# Altium PCB board.PcbDoc
Units mm, origin at the board's own origin, x right, y up, seen from the top; angles counter-clockwise.
Board outline 116 x 94 mm, 2 copper layers (Top Layer, Bottom Layer); 13 components, 88 nets, 366 pads, 97 vias.
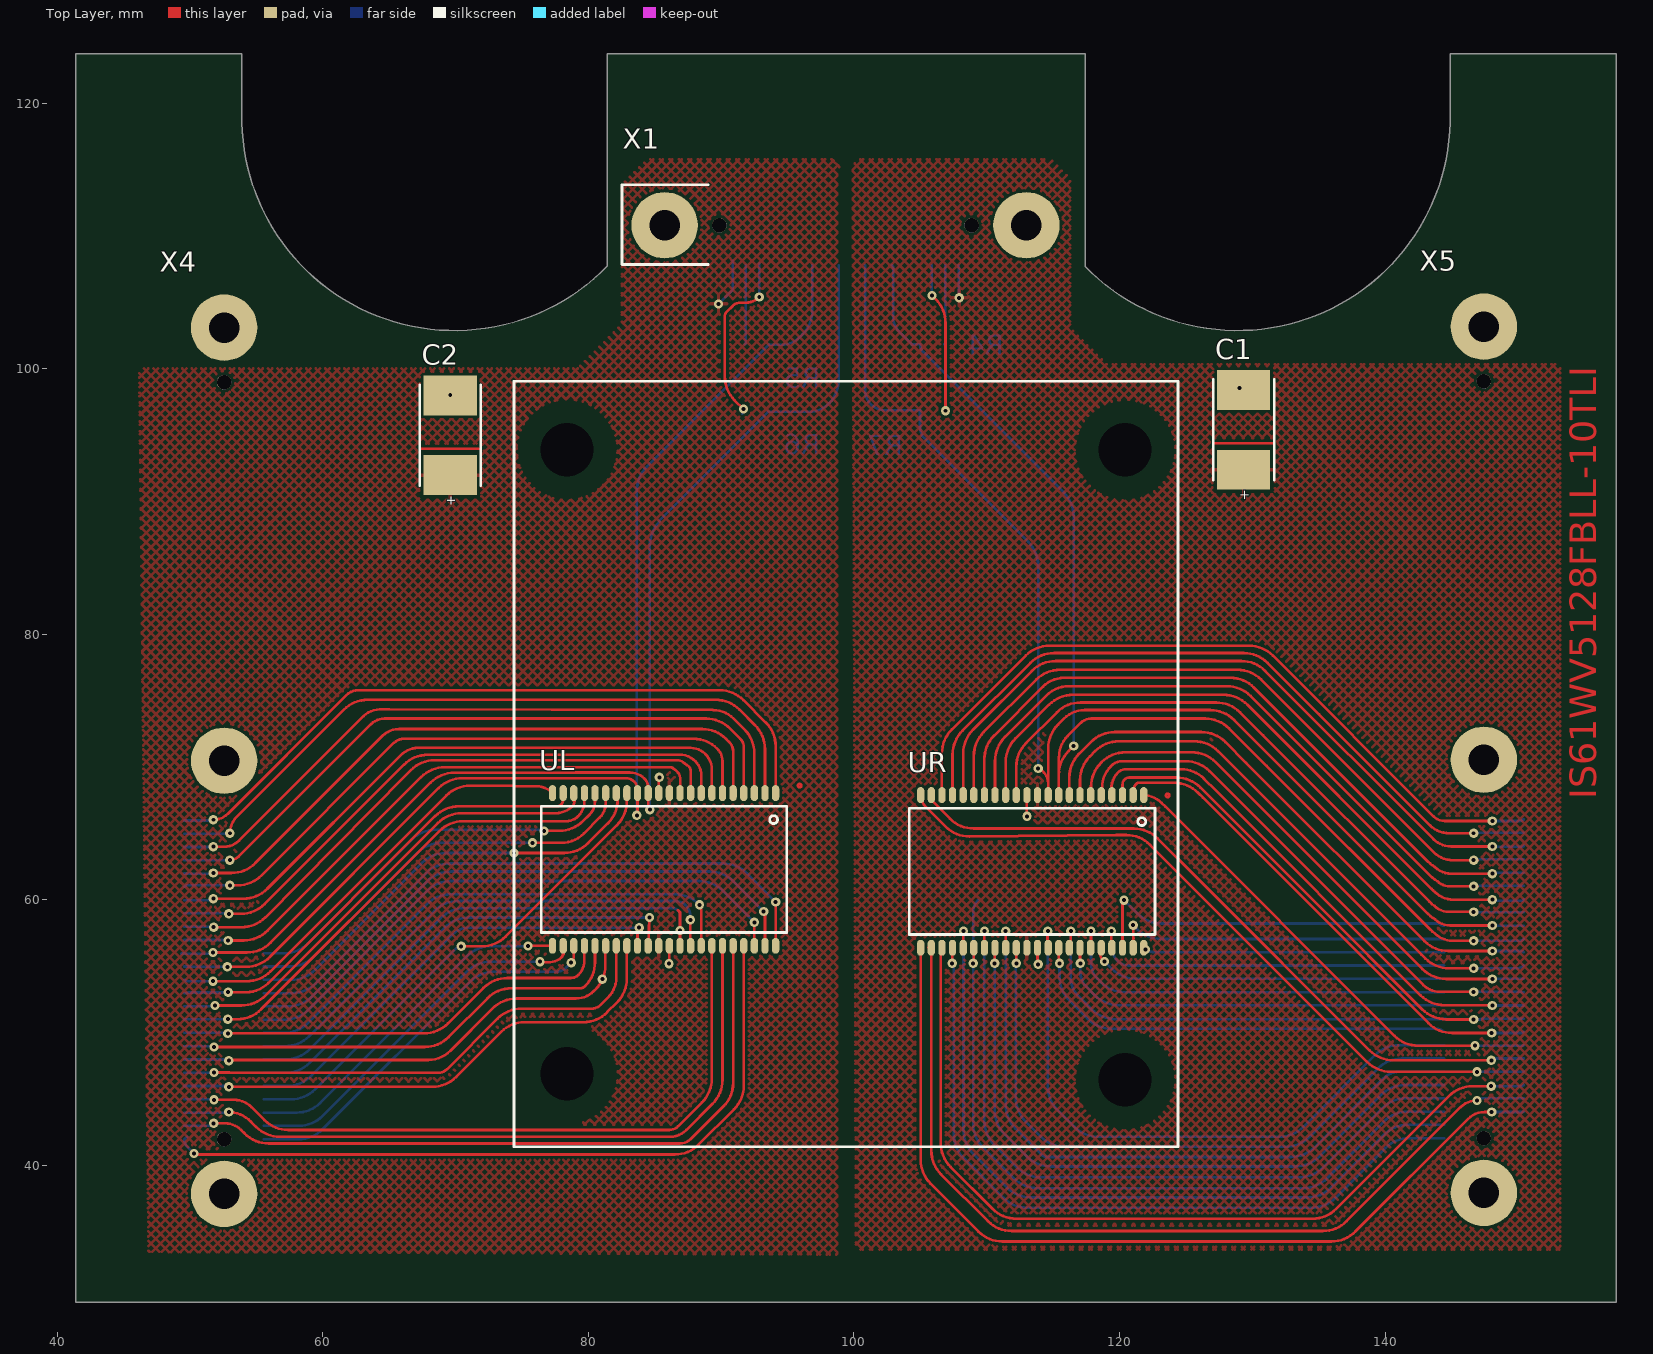
[diagram p0: Top Layer view]
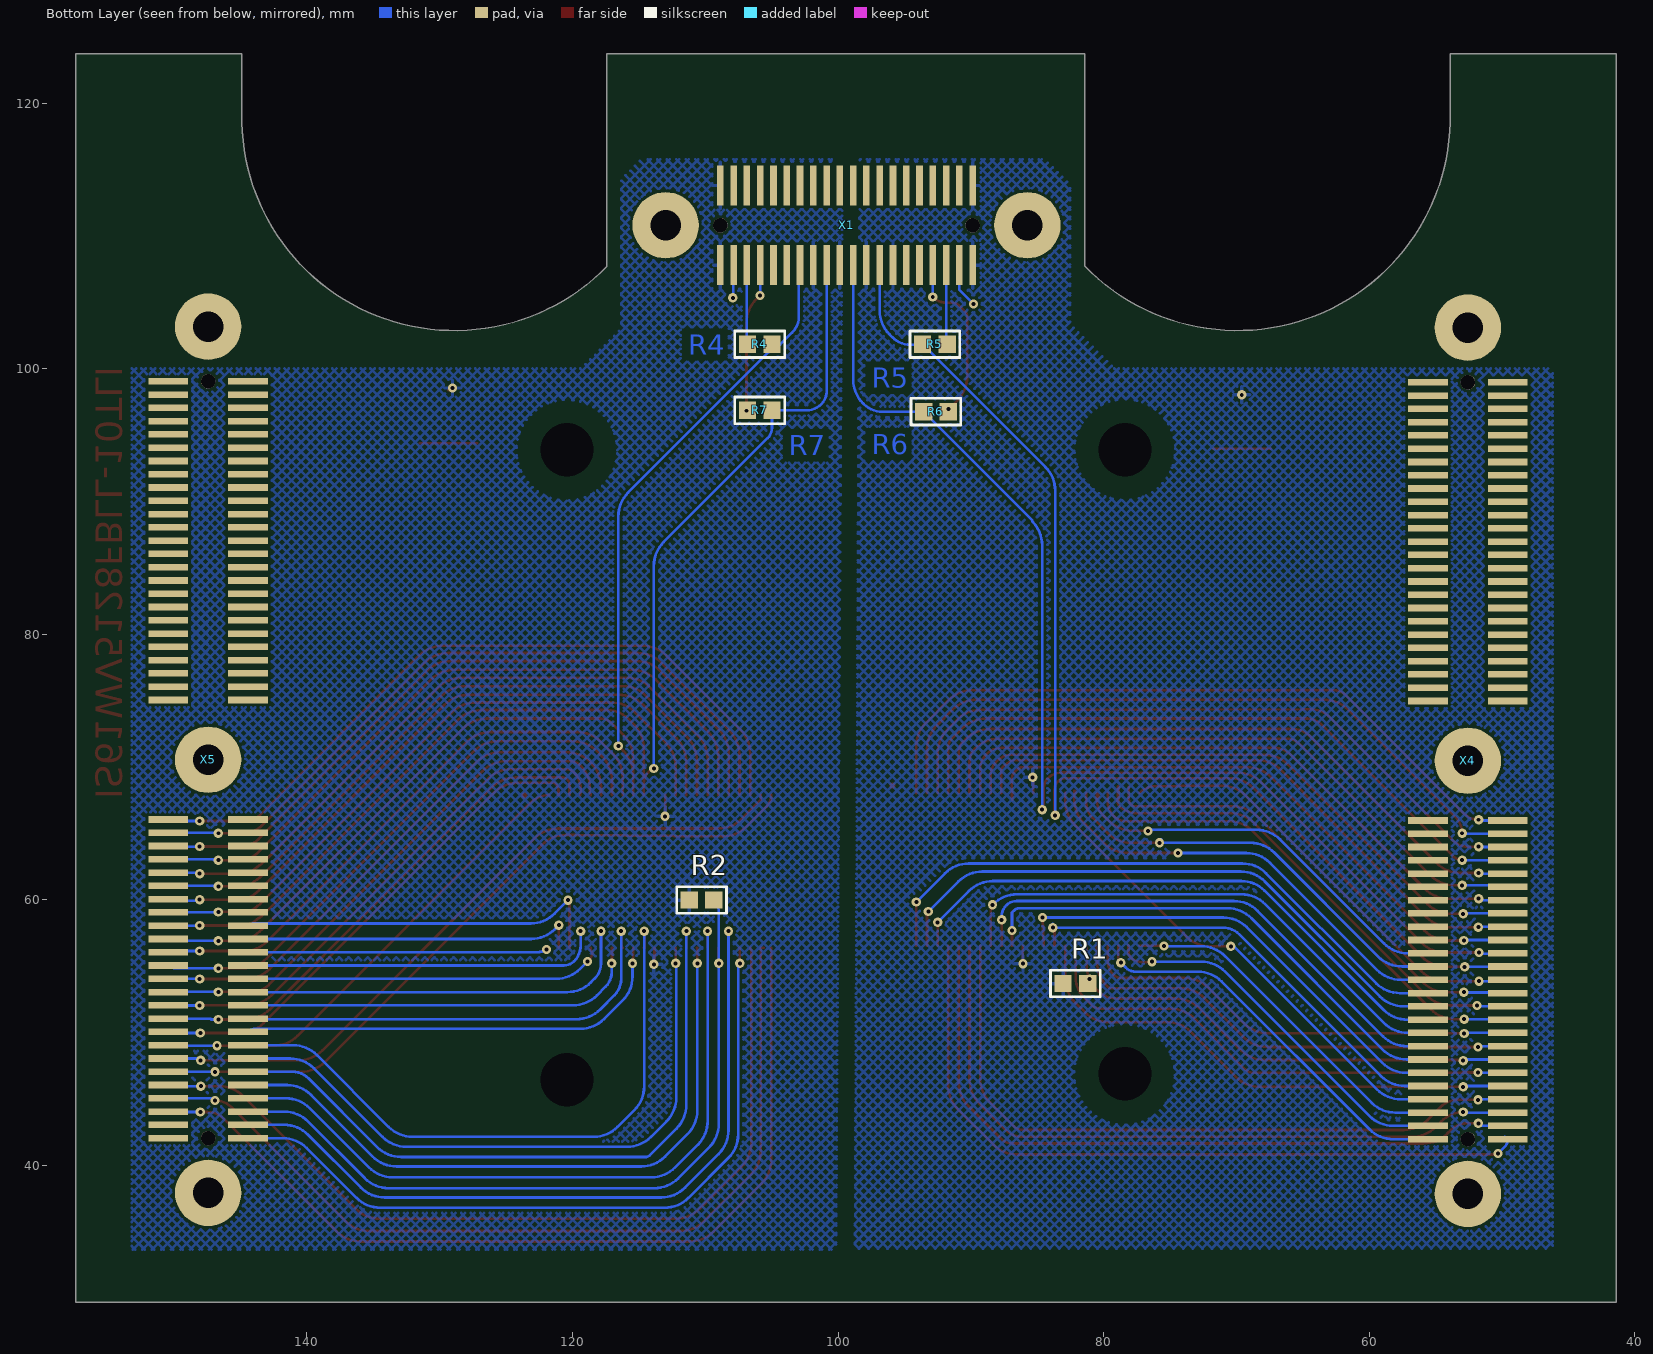
[diagram p1: Bottom Layer view, seen from below]
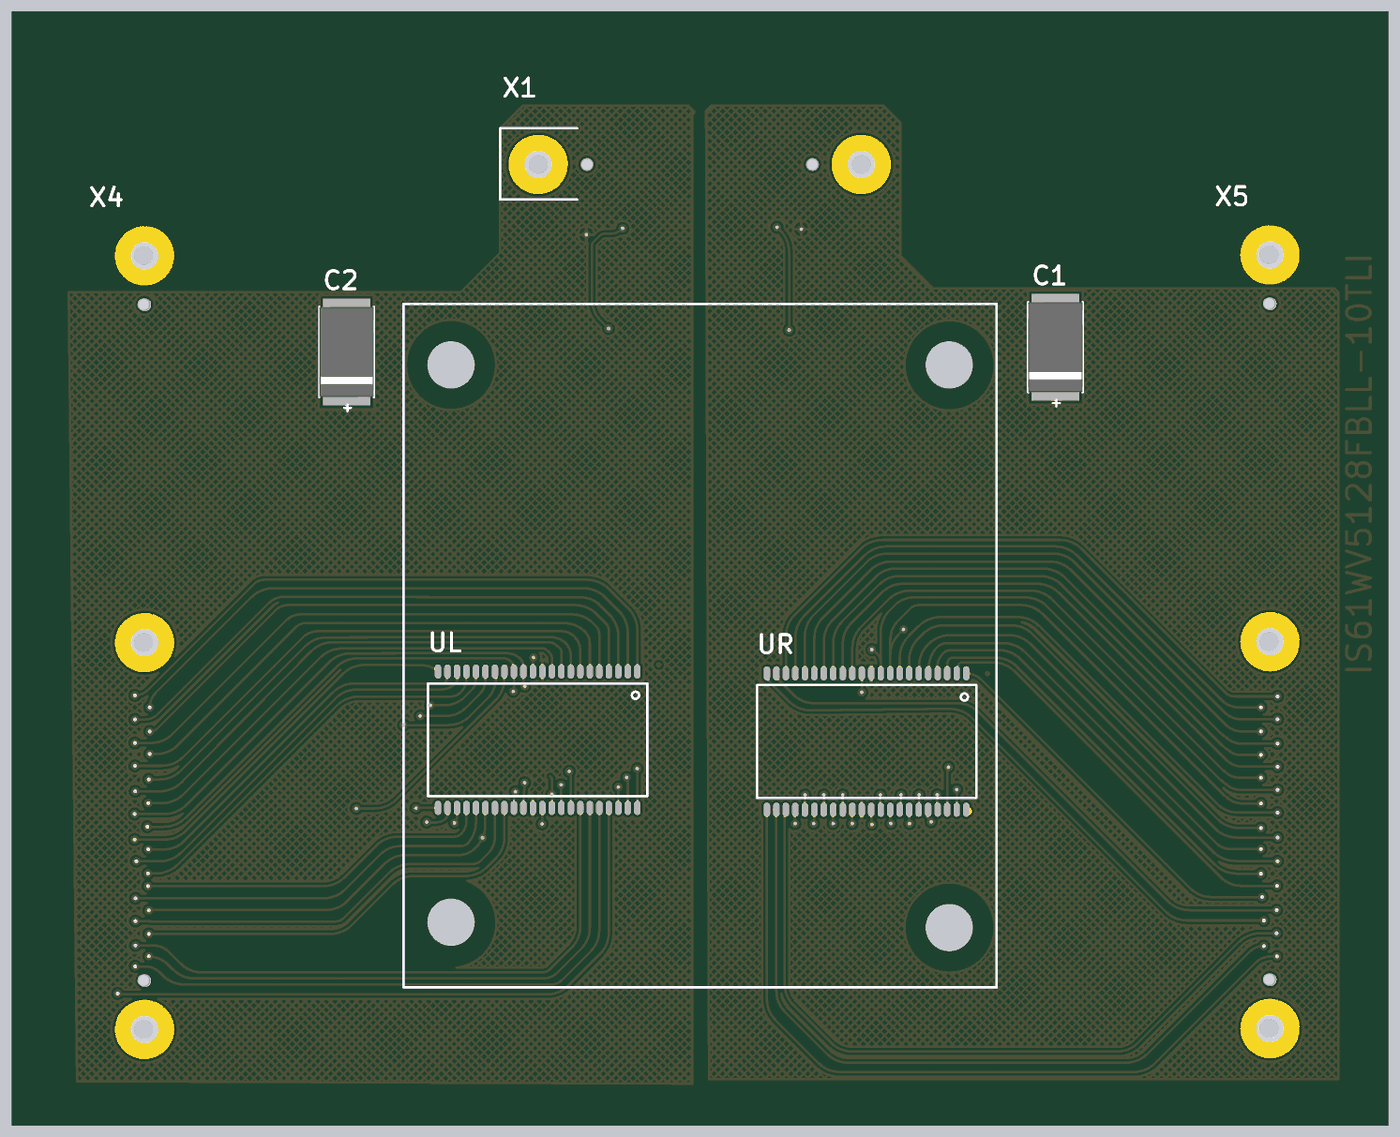
[diagram p2: 3D render of the assembled board from above, using the file's embedded part models]

## Layer stack, top to bottom
Top Solder: solder mask 0.0102, Solder Resist, Dk 3.5
Top Layer: signal copper 0.0356
Dielectric 1: dielectric 0.32, FR-4, Dk 4.8
Bottom Layer: signal copper 0.0356
Bottom Solder: solder mask 0.0102, Solder Resist, Dk 3.5

## Board outline
41.4,29.718 41.4,123.718 53.899,123.718 53.902,123.721 53.902,118.571 ccw(c69.927,118.908) 81.402,107.718 81.402,123.718 117.402,123.718 117.402,107.718 ccw(c128.877,118.908) 144.902,118.571 144.902,123.721 144.905,123.718 157.402,123.718 157.402,29.718

## Design rules (kind name [scope] priority, off if disabled: settings)
BoardOutlineClearance [All] p1: gap=0.3 ignorepadtopadclearanceinfootprint=FALSE
Clearance [All] p1: gap=0.2 ignorepadtopadclearanceinfootprint=FALSE
ComponentClearance [All] p1: gap=0.15 collisioncheckmode=3 verticalgap=0.254 showdistances=FALSE
HoleSize [All] p1: absolutevalues=TRUE maxlimit=7 minlimit=0.025 maxpercent=80.000 minpercent=20.000
MinimumAnnularRing [All] p1: minimumring=0.2
MinimumSolderMaskSliver [All] p1: minsoldermaskwidth=0.15
PolygonConnect [All] p1: connectstyle=Relief reliefconductorwidth=0.254 reliefentries=4 polygonreliefangle="90 Angle" airgapwidth=0.254
RoutingVias [All] p1: holewidth=0.4 width=0.7 viastyle="Through Hole" minholewidth=0.3 minwidth=0.5 maxholewidth=7 maxwidth=7
SilkToSolderMaskClearance [IsPad] p1: minsilkscreentomaskgap=0.15 clearancetoexposedcopper=TRUE
SolderMaskExpansion [All] p1: expansion=0.05
Width [All] p1: maxlimit=2 minlimit=0.2 preferedwidth=0.254
26 further rules are at their usual default settings.

## Components (designator, comment, footprint, x,y, rotation, side; value= is the part's Value field where it differs from the comment)
C1 "C_Ta" C_Ta 129.35,95.4 r90 top
C2 "C_Ta" C_Ta 69.596,94.996 r90 top
R1 "*" 0805 82.125,53.7 r180 bottom
R2 "*" 0805 110.278,59.988 r180 bottom
R4 "*" 0805 105.9,101.85 r0 bottom
R5 "*" 0805 92.707,101.85 r0 bottom
R6 "*" 0805 92.625,96.775 r0 bottom
R7 "*" 0805 105.9,96.875 r0 bottom
UL "IS61WV5128FBLL-10TLI" "TSOP (Type II)"#1 85.7,62.3 r270 top locked
UR "IS61WV5128FBLL-10TLI" "TSOP (Type II)"#2 113.425,62.15 r270 top locked
X1 "FSI120" FSI-120 100.03,110.997 r0 top locked (schematic designator X2)
X4 "FSI-150-L" FSI-150 52.626,70.507 r0 top locked (schematic designator X3)
X5 "FSI-150-R" FSI-150 147.501,70.582 r0 top locked (schematic designator X4)

## Footprints (in the part's own frame and the unit in brackets; to place one, negate y for a bottom-side part, rotate by r counter-clockwise, add the part's x,y. Pads: shape width x height; smd on the part's side, far side on the other; paste and mask are expansions set on the pad)
0805 [mm]
  rect 1.3x1.3 smd: 1(-0.925,0) 2(0.925,0)
  silkscreen extent -1.88,-1 1.88,1, body extent -1,-0.63 1,0.63, height 0.4
C_Ta [mm]
  rect 3x4 smd: 1(-3,0) 2(3,0)
  Top Layer lines w0.2: -1.016,2.159 -1.016,-2.159
  silkscreen extent -3.8,-2.3 3.8,2.3, body extent -3.8,-2.3 3.8,2.3, height 4.3
FSI-120 [mm]
  rect 0.5x3 smd far side: 1(8.833,-3.186) 2(7.833,-3.186) 3(6.833,-3.186) 4(5.833,-3.186) 5(4.833,-3.186) 6(3.833,-3.186) 7(2.833,-3.186) 8(1.833,-3.186) 9(0.833,-3.186) 10(-0.167,-3.186) 11(-1.167,-3.186) 12(-2.167,-3.186) 13(-3.167,-3.186) 14(-4.167,-3.186) 15(-5.167,-3.186) 16(-6.167,-3.186) 17(-7.167,-3.186) 18(-8.167,-3.186) 19(-9.167,-3.186) 20(-10.167,-3.186) 21(-10.167,2.814) 22(-9.167,2.814) 23(-8.167,2.814) 24(-7.167,2.814) 25(-6.167,2.814) 26(-5.167,2.814) 27(-4.167,2.814) 28(-3.167,2.814) 29(-2.167,2.814) 30(-1.167,2.814) 31(-0.167,2.814) 32(0.833,2.814) 33(1.833,2.814) 34(2.833,2.814) 35(3.833,2.814) 36(4.833,2.814) 37(5.833,2.814) 38(6.833,2.814) 39(7.833,2.814) 40(8.833,2.814)
  round 1.1 hole 1.1 unplated: H1(-10.167,-0.186) H2(8.833,-0.186)
  round 5 hole 2.3: UL_HOLE(12.953,-0.186) UR_HOLE(-14.287,-0.186)
  body extent -17.72,-5.19 16.38,4.81, height 8.25
FSI-150 [mm]
  round 1.1 hole 1.1 unplated: 1(-0.063,-28.521) 1(-0.063,28.479)
  rect 3x0.5 smd far side: R_1(-3.063,-28.52) R_2(2.937,-28.52) R_3(-3.063,-27.52) R_4(2.937,-27.52) R_5(-3.063,-26.52) R_6(2.937,-26.52) R_7(-3.063,-25.52) R_8(2.937,-25.52) R_9(-3.063,-24.52) R_10(2.937,-24.52) R_11(-3.063,-23.52) R_12(2.937,-23.52) R_13(-3.063,-22.52) R_14(2.937,-22.52) R_15(-3.063,-21.52) R_16(2.937,-21.52) R_17(-3.063,-20.52) R_18(2.937,-20.52) R_19(-3.063,-19.52) R_20(2.937,-19.52) R_21(-3.063,-18.52) R_22(2.937,-18.52) R_23(-3.063,-17.52) R_24(2.937,-17.52) R_25(-3.063,-16.52) R_26(2.937,-16.52) R_27(-3.063,-15.52) R_28(2.937,-15.52) R_29(-3.063,-14.52) R_30(2.937,-14.52) R_31(-3.063,-13.52) R_32(2.937,-13.52) R_33(-3.063,-12.52) R_34(2.937,-12.52) R_35(-3.063,-11.52) R_36(2.937,-11.52) R_37(-3.063,-10.52) R_38(2.937,-10.52) R_39(-3.063,-9.52) R_40(2.937,-9.52) R_41(-3.063,-8.52) R_42(2.937,-8.52) R_43(-3.063,-7.52) R_44(2.937,-7.52) R_45(-3.063,-6.52) R_46(2.937,-6.52) R_47(-3.063,-5.52) R_48(2.937,-5.52) R_49(-3.063,-4.52) R_50(2.937,-4.52) R_51(-3.063,4.479) R_52(2.937,4.479) R_53(-3.063,5.479) R_54(2.937,5.479) R_55(-3.063,6.479) R_56(2.937,6.479) R_57(-3.063,7.479) R_58(2.937,7.479) R_59(-3.063,8.479) R_60(2.937,8.479) R_61(-3.063,9.479) R_62(2.937,9.479) R_63(-3.063,10.479) R_64(2.937,10.479) R_65(-3.063,11.479) R_66(2.937,11.479) R_67(-3.063,12.479) R_68(2.937,12.479) R_69(-3.063,13.479) R_70(2.937,13.479) R_71(-3.063,14.479) R_72(2.937,14.479) R_73(-3.063,15.479) R_74(2.937,15.479) R_75(-3.063,16.479) R_76(2.937,16.479) R_77(-3.063,17.479) R_78(2.937,17.479) R_79(-3.063,18.479) R_80(2.937,18.479) R_81(-3.063,19.479) R_82(2.937,19.479) R_83(-3.063,20.479) R_84(2.937,20.479) R_85(-3.063,21.479) R_86(2.937,21.479) R_87(-3.063,22.479) R_88(2.937,22.479) R_89(-3.063,23.479) R_90(2.937,23.479) R_91(-3.063,24.479) R_92(2.937,24.479) R_93(-3.063,25.479) R_94(2.937,25.479) R_95(-3.063,26.479) R_96(2.937,26.479) R_97(-3.063,27.479) R_98(2.937,27.479) R_99(-3.063,28.479) R_100(2.937,28.479)
  round 5 hole 2.3: RB_HOLE(-0.063,-32.641) RM_HOLE(-0.063,-0.021) RU_HOLE(-0.063,32.599)
  body extent -5.14,-36.05 4.86,36.05, height 8.25
"TSOP (Type II)"#1 [mm] "TSOP, 44-Leads, Body 18,41x10,16mm, Pitch 0,80mm, IPC Medium Density"
  oval 1.2x0.55 smd: 1(-5.75,8.4) 2(-5.75,7.6) 3(-5.75,6.8) 4(-5.75,6) 5(-5.75,5.2) 6(-5.75,4.4) 7(-5.75,3.6) 8(-5.75,2.8) 9(-5.75,2) 10(-5.75,1.2) 11(-5.75,0.4) 12(-5.75,-0.4) 13(-5.75,-1.2) 14(-5.75,-2) 15(-5.75,-2.8) 16(-5.75,-3.6) 17(-5.75,-4.4) 18(-5.75,-5.2) 19(-5.75,-6) 20(-5.75,-6.8) 21(-5.75,-7.6) 22(-5.75,-8.4) 23(5.75,-8.4) 24(5.75,-7.6) 25(5.75,-6.8) 26(5.75,-6) 27(5.75,-5.2) 28(5.75,-4.4) 29(5.75,-3.6) 30(5.75,-2.8) 31(5.75,-2) 32(5.75,-1.2) 33(5.75,-0.4) 34(5.75,0.4) 35(5.75,1.2) 36(5.75,2) 37(5.75,2.8) 38(5.75,3.6) 39(5.75,4.4) 40(5.75,5.2) 41(5.75,6) 42(5.75,6.8) 43(5.75,7.6) 44(5.75,8.4)
  Top Layer circle w0.2: c-6.309,10.209 r0.125
  silkscreen extent -4.75,-9.25 4.75,9.25, body extent -5.15,-9.25 5.15,9.25, height 1.2
"TSOP (Type II)"#2 [mm] "TSOP, 44-Leads, Body 18,41x10,16mm, Pitch 0,80mm, IPC Medium Density"
  oval 1.2x0.55 smd: 1(-5.75,8.4) 2(-5.75,7.6) 3(-5.75,6.8) 4(-5.75,6) 5(-5.75,5.2) 6(-5.75,4.4) 7(-5.75,3.6) 8(-5.75,2.8) 9(-5.75,2) 10(-5.75,1.2) 11(-5.75,0.4) 12(-5.75,-0.4) 13(-5.75,-1.2) 14(-5.75,-2) 15(-5.75,-2.8) 16(-5.75,-3.6) 17(-5.75,-4.4) 18(-5.75,-5.2) 19(-5.75,-6) 20(-5.75,-6.8) 21(-5.75,-7.6) 22(-5.75,-8.4) 23(5.75,-8.4) 24(5.75,-7.6) 25(5.75,-6.8) 26(5.75,-6) 27(5.75,-5.2) 28(5.75,-4.4) 29(5.75,-3.6) 30(5.75,-2.8) 31(5.75,-2) 32(5.75,-1.2) 33(5.75,-0.4) 34(5.75,0.4) 35(5.75,1.2) 36(5.75,2) 37(5.75,2.8) 38(5.75,3.6) 39(5.75,4.4) 40(5.75,5.2) 41(5.75,6) 42(5.75,6.8) 43(5.75,7.6) 44(5.75,8.4)
  Top Layer circle w0.2: c-5.725,10.2 r0.125
  silkscreen extent -4.75,-9.25 4.75,9.25, body extent -5.15,-9.25 5.15,9.25, height 1.2

## Part data
C1 C2: "tantalum capacitor"
R1 R2 R4 R5 R6 R7: library part R0805, "0805 resistor"
X4: "fsi 150 left"
X5: "fsi 150 right"

## Free pads (board coordinates)
  round 7 on Keep-Out: 10(78.425,46.85) 11(78.4,93.907) 12(120.425,93.875) 13(120.425,46.457)
  round 0 hole 4 unplated: Hole(78.4,46.907) Hole(78.4,93.907) Hole(120.4,46.457) Hole(120.4,93.907)

## Via types
v1: diameter 0.7, hole 0.3, Top Layer to Bottom Layer, tented both sides, 93 vias
v2: diameter 0.7, hole 0.3, Top Layer to Bottom Layer, 3 vias
v3: diameter 0.7, hole 0.3, Top Layer to Bottom Layer, tented top, 1 vias

## Nets (pads, with @x,y where several pads share a name; then routed paths per layer and width w, separated by ;. In a path a pad name is that pad's centre, name@x,y a point inside that pad or via, vN(x,y) a via of type N, cw(c..) or ccw(c..) an arc to the next point about the centre after c; other vN are vias at no path point)
L_1: UL.1 X4.R_49 | length 54.2
  Top Layer w0.2: v1(51.75,66.04) ccw(c51.75,67.585) 52.843,66.493 61.784,75.434 cw(c62.651,74.567) 62.651,75.793 64.299,75.793 89.88,75.793 cw(c89.88,73.253) 91.676,75.049 93.356,73.369 cw(c91.56,71.573) 94.1,71.573 UL.1
  Bottom Layer w0.2: X4.R_49 51.686,65.986 ccw(c51.686,66.17) v1@51.816,66.04
L_2: UL.2 X4.R_47 | length 53.2
  Top Layer w0.2: v1(53,65.024) cw(c54.753,65.024) 53.513,66.263 61.581,74.331 cw(c63.377,72.535) 63.377,75.075 89.586,75.075 cw(c89.586,72.535) 91.382,74.331 92.556,73.157 cw(c90.76,71.361) 93.3,71.361 UL.2
  Bottom Layer w0.2: X4.R_47 52.741,64.986 ccw(c52.741,65.115) v1@52.832,65.024
L_21: UL.21 X4.R_23 | length 35.4
  Top Layer w0.2: v1(52.875,53.05) 54.224,53.05 ccw(c54.224,55.419) 55.899,53.744 68.461,66.306 cw(c70.257,64.51) 70.257,67.05 77.657,67.05 ccw(c77.657,67.458) 77.945,67.169 ccw(c77.805,67.311) 77.948,67.172 ; 77.949,67.172 ccw(c77.573,67.542) 78.1,67.542 UL.21 UL.21@78.1,68.519
  Bottom Layer w0.2: X4.R_23 49.757,52.986 ccw(c49.757,53.118) 49.85,53.025 52.815,53.025 ccw(c52.815,53.11) v1(52.875,53.05)
L_22: UL.22 X4.R_25 | length 33.8
  Top Layer w0.2: v1(51.726,53.882) 54.266,53.882 ccw(c54.266,56.422) 56.062,54.626 69.302,67.865 cw(c71.098,66.069) 71.098,68.609 74.295,68.609 cw(c74.295,68.461) 74.4,68.566 76.055,68.566 cw(c76.055,66.805) UL.22
  Bottom Layer w0.2: X4.R_25 ccw(c49.816,54.239) 49.816,53.882 v1(51.726,53.882)
L_23: UL.23 X4.R_6 | length 26.7
  Top Layer w0.2: v1(75.45,56.525) cw(c75.51,56.465) 75.51,56.55 UL.23
  Bottom Layer w0.2: X4.R_6 58.021,43.986 ccw(c58.021,46.526) 59.817,44.73 70.868,55.781 cw(c72.664,53.985) 72.664,56.525 v1(75.45,56.525)
L_24: UL.24 X4.R_4 | length 29
  Top Layer w0.2: v1(76.35,55.35) ccw(c76.426,55.426) 76.426,55.318 77.123,55.318 ccw(c77.123,56.503) 77.961,55.665 ccw(c77.625,56.002) 78.1,56.002 UL.24 ccw(c78.1,56.61) 78.143,56.568 78.15,56.575 78.15,55.985 cw(c78.065,55.985) 78.125,55.925
  Bottom Layer w0.2: X4.R_4 58.184,42.986 ccw(c58.184,45.526) 59.98,43.73 70.856,54.606 cw(c72.652,52.81) 72.652,55.35 v1(76.35,55.35)
L_25: UL.25 X4.R_2 | length 29.7
  Top Layer w0.2: v1(78.7,55.275) ccw(c78.217,55.758) 78.9,55.758 UL.25
  Bottom Layer w0.2: X4.R_2 58.188,41.986 ccw(c58.188,44.526) 59.984,42.73 71.11,53.856 cw(c72.906,52.06) 72.906,54.6 77.589,54.6 ccw(c77.589,55.651) 78.333,54.908 v1(78.7,55.275)
L_42: UL.42 X4.R_20 | length 44.1
  Top Layer w0.2: v1@92.475,58.375 cw(c92.415,58.315) v1(92.5,58.315) UL.42
  Bottom Layer w0.2: X4.R_20 57.118,50.986 ccw(c57.118,53.526) 58.915,51.73 67.891,60.707 cw(c69.625,58.972) 69.625,61.425 88.338,61.425 cw(c88.338,58.885) 90.134,60.681 v1(92.5,58.315)
L_43: UL.43 X4.R_22 | length 45.4
  Top Layer w0.2: v1(93.2,59.125) cw(c92.959,58.884) 93.3,58.884 UL.43
  Bottom Layer w0.2: X4.R_22 57.4,51.986 ccw(c57.4,54.526) 59.196,52.73 67.865,61.399 cw(c69.661,59.603) 69.661,62.143 89.13,62.143 cw(c89.13,59.603) 90.926,61.399 v1(93.2,59.125)
L_44: UL.44 X4.R_24 | length 46.8
  Top Layer w0.2: UL.44 v1(94.1,59.85)
  Bottom Layer w0.2: X4.R_24 57.682,52.986 ccw(c57.682,55.526) 59.478,53.73 67.753,62.006 cw(c69.549,60.21) 69.549,62.75 90.148,62.75 cw(c90.148,60.21) 91.944,62.006 v1(94.1,59.85)
LA0: UL.3 X4.R_45 | length 51.9
  Top Layer w0.2: v1(51.75,64.008) 52.571,64.008 ccw(c52.571,65.604) 53.699,64.475 63.064,73.841 cw(c64.299,72.606) 64.299,74.352 65.012,74.352 89.387,74.3 cw(c89.387,72.115) 90.932,73.66 91.756,72.836 cw(c89.96,71.04) 92.5,71.04 UL.3
  Bottom Layer w0.2: X4.R_45 51.764,63.986 ccw(c51.764,64.06) v1@51.816,64.008
LA1: UL.4 X4.R_43 | length 50.7
  Top Layer w0.2: v1(53,62.992) ccw(c53,63.914) 53.652,63.262 63.625,73.235 cw(c64.65,72.211) 64.65,73.66 88.864,73.66 cw(c88.864,71.12) 90.66,72.916 91.44,72.136 cw(c90.812,71.508) 91.7,71.508 UL.4
  Bottom Layer w0.2: X4.R_43 49.566,62.989 52.829,62.989 v1@52.832,62.992
LA2: UL.5 X4.R_41 | length 49.6
  Top Layer w0.2: v1(51.75,62.025) 53.115,62.025 ccw(c53.115,64.565) 54.911,62.769 64.509,72.367 cw(c65.735,71.141) 65.735,72.875 88.573,72.875 cw(c88.573,70.335) 90.369,72.131 90.6,71.9 cw(c89.876,71.176) 90.9,71.176 UL.5
  Bottom Layer w0.2: X4.R_41 49.759,61.986 cw(c49.759,61.951) 49.784,61.976 51.632,61.976 ccw(c51.632,62.143) v1(51.75,62.025)
LA3: UL.6 X4.R_39 | length 48.2
  Top Layer w0.2: v1(53,61.1) 53.582,61.1 ccw(c53.582,63.64) 55.378,61.844 65.376,71.842 ; 65.376,71.842 cw(c66.086,71.132) 66.086,72.136 67.172,72.136 87.923,72.136 cw(c87.923,69.623) 89.7,71.4 cw(c88.734,70.434) 90.1,70.434 UL.6
  Bottom Layer w0.2: X4.R_39 cw(c49.837,60.712) 49.837,61.1 v1(53,61.1)
LA4: UL.7 X4.R_37 | length 47.1
  Top Layer w0.2: v1(51.75,60.1) 54.019,60.1 ccw(c54.019,62.64) 55.815,60.844 65.89,70.919 cw(c67.172,69.636) 67.172,71.45 87.714,71.45 cw(c87.714,69.914) 88.8,71 cw(c87.593,69.793) 89.3,69.793 UL.7
  Bottom Layer w0.2: X4.R_37 51.551,59.986 ccw(c51.551,60.374) v1@51.825,60.1
LA5: UL.16 X4.R_26 | length 33.3
  Top Layer w0.2: v1(74.4,63.537) 78.185,63.537 ccw(c78.185,66.077) 79.981,64.281 81.456,65.756 ccw(c79.66,67.552) 82.2,67.552 82.2,68.225 82.153,68.178 ccw(c82.281,68.05) UL.16
  Bottom Layer w0.2: X4.R_26 57.609,53.986 ccw(c57.609,56.526) 59.405,54.73 67.468,62.793 cw(c69.264,60.997) 69.264,63.537 v1(74.4,63.537)
LA6: UL.17 X4.R_28 | length 31.9
  Top Layer w0.2: v1(75.793,64.299) 77.949,64.299 ccw(c77.949,66.713) 79.655,65.005 80.85,66.2 ccw(c79.764,67.286) 81.3,67.286 UL.17
  Bottom Layer w0.2: X4.R_28 57.526,54.986 ccw(c57.526,57.526) 59.322,55.73 67.147,63.555 cw(c68.943,61.759) 68.943,64.299 v1(75.793,64.299) 75.793,64.457 v1@75.675,64.575
LA7: UL.18 X4.R_30 | length 30.6
  Top Layer w0.2: v1(76.65,65.2) 77.798,65.2 ccw(c77.798,67.74) 79.594,65.944 80.104,66.454 ccw(c79.148,67.41) 80.5,67.41 UL.18 ccw(c80.786,67.764) UL.18@80.382,67.764
  Bottom Layer w0.2: X4.R_30 57.09,55.986 ccw(c57.09,58.526) 58.886,56.73 66.686,64.531 cw(c68.482,62.735) 68.482,65.275 76.469,65.275 cw(c76.469,65.019) v1(76.65,65.2)
LA8: UL.19 X4.R_19 | length 37.6
  Top Layer w0.2: v1(52.85,51.025) 53.565,51.025 ccw(c53.565,53.565) 55.361,51.769 68.782,65.19 cw(c70.578,63.394) 70.578,65.934 78.34,65.934 ccw(c78.34,67.185) 79.225,66.3 ccw(c78.078,67.447) 79.7,67.447 UL.19
  Bottom Layer w0.2: X4.R_19 49.563,51 49.571,51.008 52.809,51.008 ccw(c52.809,51.066) v1(52.85,51.025)
LA9: UL.20 X4.R_21 | length 36.7
  Top Layer w0.2: v1(51.875,52.05) 53.872,52.05 ccw(c53.872,54.59) 55.668,52.794 68.664,65.79 cw(c70.46,63.994) 70.46,66.534 77.544,66.534 ccw(c77.544,68.295) 78.789,67.05 ccw(c78.414,67.425) 78.945,67.425
  Top Layer w0.254: UL.20@78.9,68.514 UL.20 78.9,67.558 ccw(c79.053,67.558) 78.945,67.45 78.945,67.425
  Bottom Layer w0.2: X4.R_21 51.721,51.986 ccw(c51.721,52.204) v1(51.875,52.05)
LA10: UL.26 X4.R_17 | length 33.6
  Top Layer w0.2: v1(52.85,49.95) 67.623,49.95 ccw(c67.623,52.49) 69.419,50.694 72.104,53.379 cw(c73.901,51.583) 73.901,54.123 78.686,54.123 ccw(c78.686,54.918) 79.248,54.356 ccw(c78.157,55.447) 79.7,55.447 UL.26
  Bottom Layer w0.2: X4.R_17 52.762,49.986 cw(c52.762,49.862) v1(52.85,49.95)
LA11: UL.27 X4.R_15 | length 35.1
  Top Layer w0.2: v1(51.8,48.925) 67.673,48.925 ccw(c67.673,51.465) 69.469,49.669 72.396,52.596 cw(c74.192,50.8) 74.192,53.34 79.34,53.34 ccw(c79.34,53.929) 79.756,53.512 ccw(c77.96,55.309) 80.5,55.309 UL.27
  Bottom Layer w0.2: X4.R_15 51.652,48.986 cw(c51.652,48.777) v1(51.8,48.925)
LA12: R1.2 UL.28 X4.R_13 | length 36
  Top Layer w0.2: 53.3,47.95 67.933,47.95 ccw(c67.933,50.302) 69.596,48.639 72.788,51.831 cw(c74.584,50.035) 74.584,52.575 79.072,52.575 ccw(c79.072,54.453) 80.4,53.125 80.536,53.261 ccw(c78.74,55.057) 81.28,55.057 81.28,56.388 ccw(c81.232,56.436) 81.3,56.436 UL.28
  Bottom Layer w0.2: X4.R_13 52.716,47.986 cw(c52.716,47.691) v1(52.925,47.9)
  other v1: 81.054,54.034
LA13: UL.29 X4.R_11 | length 38.1
  Top Layer w0.2: v1@51.75,47 52.965,47 cw(c52.965,46.915) 53.025,46.975 68.688,46.975 ccw(c68.688,47.893) 69.337,47.244 73.165,51.072 cw(c74.961,49.276) 74.961,51.816 80.226,51.816 ccw(c80.226,52.817) 80.934,52.109 81.475,52.65 ccw(c79.966,54.159) 82.1,54.159 UL.29
  Bottom Layer w0.2: X4.R_11 51.717,46.986 ccw(c51.717,47.033) v1@51.75,47
  other v1: 51.8,47
LA14: UL.30 X4.R_9 | length 39.4
  Top Layer w0.2: v1@52.832,45.925 68.241,45.925 ccw(c68.241,48.465) 70.037,46.669 73.45,50.082 cw(c75.184,48.347) 75.184,50.8 79.623,50.8 ccw(c79.623,53.34) 81.419,51.544 82.156,52.281 ccw(c80.36,54.077) 82.9,54.077 UL.30
  Bottom Layer w0.2: X4.R_9 52.684,45.986 cw(c52.684,45.777) v1@52.832,45.925
  other v1: 52.925,45.925
LA15: UL.38 X4.R_7 | length 52.6
  Top Layer w0.2: v1@51.775,44.95 53.297,44.95 cw(c53.297,43.072) 54.625,44.4 55.609,43.416 ccw(c57.405,45.212) 57.405,42.672 86.079,42.672 ccw(c86.079,43.621) 86.75,42.95 88.556,44.756 ccw(c86.76,46.552) 89.3,46.552 UL.38
  Bottom Layer w0.2: X4.R_7 51.687,44.986 cw(c51.687,44.862) v1@51.775,44.95
  other v1: 51.8,44.95
LA16: UL.39 X4.R_5 | length 53.5
  Top Layer w0.2: v1@52.798,44.038 cw(c52.798,41.498) 54.594,43.294 54.981,42.908 ccw(c56.777,44.704) 56.777,42.164 86.15,42.164 ccw(c86.15,43.898) 87.376,42.672 89.356,44.652 ccw(c87.56,46.448) 90.1,46.448 UL.39
  Bottom Layer w0.2: X4.R_5 52.708,43.986 ccw(c52.708,44.162) v1@52.832,44.038
  other v1: 52.925,44.038
LA17: UL.40 X4.R_3 | length 54.5
  Top Layer w0.2: v1@51.816,43.18 52.8,43.18 cw(c52.8,43.137) 52.83,43.167 cw(c52.622,41.446) 53.848,42.672 54.12,42.4 ccw(c55.916,44.196) 55.916,41.656 86.868,41.656 ccw(c86.868,42.882) 87.735,42.015 90.156,44.436 ccw(c88.36,46.232) 90.9,46.232 UL.40
  Bottom Layer w0.2: X4.R_3 51.349,42.986 ccw(c51.349,43.647) v1@51.816,43.18
  other v1: 51.775,43.18
LA18: UL.41 X4.R_1 | length 56.1
  Top Layer w0.2: v1(50.3,40.9) ccw(c50.481,41.081) 50.481,40.825 86.509,40.825 ccw(c86.509,43.365) 88.305,41.569 90.956,44.22 ccw(c89.16,46.016) 91.7,46.016 UL.41
  Bottom Layer w0.2: X4.R_1@49.784,42.164 49.637,42.017 cw(c49.563,42.091) X4.R_1 ccw(c50.407,41.986) 49.81,41.39 ; 49.81,41.39 v1(50.3,40.9)
LCS: UL.8 X4.R_35 | length 45.9
  Top Layer w0.2: v1(52.925,58.95) 53.823,58.95 ccw(c53.823,61.49) 55.619,59.694 66.109,70.184 cw(c67.905,68.387) 67.905,70.927 69.165,70.927 80.4,70.943 86.86,70.943 cw(c86.86,69.26) 88.05,70.45 cw(c86.964,69.364) 88.5,69.364 UL.8
  Bottom Layer w0.2: X4.R_35 52.837,58.986 cw(c52.837,58.862) v1(52.925,58.95)
LD0: UL.9 X4.R_33 | length 45.2
  Top Layer w0.2: v1(51.775,57.95) 53.873,57.95 ccw(c53.873,60.49) 55.669,58.694 66.317,69.465 66.631,69.778 cw(c68.427,67.982) 68.427,70.522 69.085,70.522 86.662,70.522 cw(c86.662,69.717) 87.232,70.286 cw(c86.272,68.672) 87.6,70 cw(c87.359,69.759) 87.7,69.759 UL.9
  Bottom Layer w0.2: X4.R_33 51.687,57.986 cw(c51.687,57.862) v1(51.775,57.95)
LD1: UL.10 X4.R_31 | length 44.6
  Top Layer w0.2: v1(52.875,56.95) 54.048,56.95 ccw(c54.048,59.49) 55.844,57.694 67.402,69.252 cw(c69.198,67.456) 69.198,69.996 86.158,69.996 cw(c86.158,69.635) 86.18,69.995 cw(c86.158,69.635) 86.414,69.89 cw(c85.851,68.953) 86.624,69.726 86.675,69.675 cw(c86.062,69.062) 86.929,69.062 86.929,68.25 ccw(c86.999,68.18) 86.9,68.18 UL.10 86.9,67.641 cw(c86.791,67.641) UL.10@86.868,67.564
  Bottom Layer w0.2: X4.R_31 52.787,56.986 cw(c52.787,56.862) v1(52.875,56.95)
LD2: R6.2 UL.13 X1.11 X4.R_29 | length 92
  Top Layer w0.2: v1(51.726,56.037) 54.266,56.037 ccw(c54.266,58.577) 56.062,56.781 68.119,68.837 cw(c69.915,67.041) 69.915,69.581 70.511,69.581 79.052,69.596 83.114,69.596 cw(c83.114,68.027) 84.223,69.137 cw(c83.556,68.469) 84.5,68.469 UL.13 84.5,66.925 v1(84.625,66.8)
  Bottom Layer w0.2: X4.R_29 49.438,55.986 ccw(c49.438,55.862) 49.35,55.95 51.517,55.95 ccw(c51.517,56.246) v1(51.726,56.037) ; v1(84.625,66.8) 84.625,86.704 cw(c87.165,86.704) 85.315,88.445 ccw(c85.169,88.581) 85.369,88.594 93.531,96.756 96.641,96.756 ccw(c96.641,98.769) 98.064,97.346 98.119,97.401 ccw(c96.323,99.197) 98.863,99.197 X1.11
LD3: R5.2 UL.14 X1.13 X4.R_27 | length 89.9
  Top Layer w0.2: v1(52.804,54.959) 54.207,54.959 ccw(c54.207,57.499) 56.003,55.703 68.725,68.425 cw(c70.521,66.629) 70.521,69.169 82.812,69.169 cw(c82.812,68.251) 83.462,68.9 cw(c82.886,68.324) 83.7,68.324 UL.14 83.7,66.496 cw(c83.529,66.496) v1(83.65,66.375)
  Bottom Layer w0.2: X4.R_27 49.865,54.986 cw(c49.865,54.894) 49.93,54.959 v1(52.804,54.959) ; v1(83.65,66.375) 83.65,90.816 cw(c86.19,90.816) 84.394,92.612 R5.2@93.596,101.814 ; R5.2 R5.2@93.596,101.814 ; X1.13 96.863,104.381 cw(c94.323,104.381) 96.119,102.585 95.909,102.375 cw(c94.556,103.728) 94.556,101.814 R5.2@93.596,101.814
LD4: UL.31 X4.R_10 | length 34.7
  Top Layer w0.2: UL.31 83.7,57.622 cw(c84.11,57.622) v1(83.82,57.912)
  Bottom Layer w0.2: X4.R_10 57.309,45.986 ccw(c57.309,48.526) 59.105,46.73 69.768,57.393 cw(c71.021,56.139) 71.021,57.912 v1(83.82,57.912) v1@83.82,58.21
LD5: UL.32 X4.R_12 | length 35.8
  Top Layer w0.2: UL.32 v1(84.6,58.675)
  Bottom Layer w0.2: X4.R_12 57.209,46.986 ccw(c57.209,49.526) 59.005,47.73 69.218,57.943 cw(c70.986,56.175) 70.986,58.675 v1(84.6,58.675)
LD6: UL.35 X4.R_14 | length 41.6
  Top Layer w0.2: UL.35 86.9,58.86 ccw(c86.383,58.86) 86.749,59.225 86.9,59.074 v1(86.9,57.705)
  Bottom Layer w0.2: X4.R_14 57.184,47.986 ccw(c57.184,50.526) 58.98,48.73 68.881,58.631 cw(c70.677,56.835) 70.677,59.375 86.362,59.375 cw(c86.362,58.863) 86.724,59.225 86.9,59.049 v1(86.9,57.705)
LD7: UL.36 X4.R_16 | length 39.3
  Top Layer w0.2: v1(87.675,58.5) 87.675,56.575 UL.36
  Bottom Layer w0.2: X4.R_16 57.159,48.986 ccw(c57.159,51.526) 58.955,49.73 68.406,59.181 cw(c70.202,57.385) 70.202,59.925 86.54,59.925 cw(c86.54,58.815) 87.325,59.6 cw(c86.48,58.755) 87.675,58.755 v1(87.675,58.5)
LGND: C2.2 R1.1 UL.12 UL.34 X1.12 X1.14 X1.20 X1.21 | length 2.8
  Top Layer w0.2: C2.2 v2(69.596,98.044) ; UL.12 v1@85.3,69.431 ; v1(86.075,55.2) ccw(c86.015,55.26) 86.1,55.26 UL.34
  other v1: 85.344,69.235
LOE: UL.37 X4.R_18 | length 40.2
  Top Layer w0.2: v1(88.366,59.629) 88.366,59.49 cw(c88.042,59.166) 88.5,59.166 UL.37
  Bottom Layer w0.2: X4.R_18 57.084,49.986 ccw(c57.084,52.526) 58.88,50.73 67.831,59.681 cw(c69.627,57.885) 69.627,60.425 86.518,60.425 cw(c86.518,57.885) 88.314,59.681 v1(88.366,59.629)
LWE: UL.15 X4.R_8 | length 37.5
  Top Layer w0.2: v1(70.418,56.503) 71.974,56.503 ccw(c71.974,59.043) 73.77,57.247 82.156,65.632 ccw(c80.36,67.428) 82.9,67.428 UL.15
  Bottom Layer w0.2: X4.R_8 57.609,44.986 ccw(c57.609,47.526) 59.405,45.73 70.178,56.503 v1(70.418,56.503)
NetC1_1: C1.1 UR.11 UR.33 X1.2 | length 2.5
  Bottom Layer w0.2: X1.2 107.894,107.78 107.894,105.381 v1(107.925,105.35)
NetC2_1: C2.1 UL.11 UL.33 X1.19 | length 3.7
  Bottom Layer w0.2: v1(89.803,104.889) 90.863,105.95 X1.19 90.863,108.105 X1.19@90.88,108.122
NetR4_2: R4.2 X1.3 | length 6
  Bottom Layer w0.2: R4.2 106.863,101.888 X1.3
NetR5_1: R5.1 X1.18 | length 6
  Bottom Layer w0.2: R5.1 91.782,101.839 91.863,101.921 X1.18
NetR6_1: R6.1 X1.17 | length 13.7
  Top Layer w0.2: v1(91.675,96.975) 91.019,97.631 cw(c92.815,99.427) 90.275,99.427 90.275,103.975 cw(c90.697,103.975) 90.399,104.274 90.875,104.75 cw(c91.441,104.184) 91.441,104.984 91.863,104.984 ccw(c91.863,106.368) 92.842,105.39 v1(92.868,105.416)
  Bottom Layer w0.2: v1(91.675,96.975) 91.675,96.812 cw(c91.414,96.812) 91.599,96.628 91.667,96.696 ccw(c91.589,96.775) R6.1 ; X1.17@92.863,107.95 92.866,107.947 92.866,105.419 v1(92.868,105.416)
NetR7_2: R7.2 X1.4 | length 11.4
  Top Layer w0.2: v1(105.875,105.525) 106.156,105.244 cw(c104.36,103.448) 106.9,103.448 v3(106.9,96.842)
  Bottom Layer w0.2: X1.4 105.863,105.554 ccw(c105.904,105.554) v1(105.875,105.525) ; R7.2 cw(c106.825,96.773) 106.897,96.845 v3(106.9,96.842)
R_1: UR.1 X5.R_16 | length 36.4
  Top Layer w0.2: UR.1 121.782,67.9 121.772,67.891 cw(c121.772,65.93) 123.158,67.317 123.45,67.025 140.706,49.769 ccw(c142.502,51.565) 142.502,49.025 v1(146.775,49.025)
  Bottom Layer w0.2: v1(146.775,49.025) 150.35,49.025 ccw(c150.35,49.149) X5.R_16
R_2: UR.2 X5.R_18 | length 37.7
  Top Layer w0.2: UR.2 121.045,67.9 121.054,67.891 121.054,68.244 cw(c121.769,68.244) 121.261,68.747 cw(c121.404,68.608) 121.264,68.75 cw(c121.424,68.589) 121.424,68.817 124.106,68.817 cw(c124.106,66.277) 125.902,68.073 126.275,67.7 143.256,50.719 ccw(c145.052,52.515) 145.052,49.975 v1(148.025,49.975)
  Bottom Layer w0.2: v1(148.025,49.975) 150.229,49.975 ccw(c150.229,50.27) X5.R_18
R_21: UR.21 X5.R_14 | length 53
  Top Layer w0.2: UR.21 105.825,67.525 107.23,66.12 ccw(c109.026,67.916) 109.026,65.376 121.079,65.376 cw(c121.079,62.836) 122.875,64.632 125.724,61.784 138.839,48.669 ccw(c140.635,50.465) 140.635,47.925 v1(148,47.925)
  Bottom Layer w0.2: v1(148,47.925) 148,48.129 147.995,48.134 ccw(c148.17,48.31) 148.17,48.061 X5.R_14
R_22: UR.22 X5.R_12 | length 54
  Top Layer w0.2: UR.22 ccw(c106.242,67.9) 105.382,67.039 106.326,66.095 106.902,65.519 ccw(c108.698,67.315) 108.698,64.775 119.737,64.897 120.501,64.897 cw(c120.501,62.357) 122.297,64.153 138.65,47.8 ccw(c140.446,49.597) 140.446,47.057 v1(146.917,47.057)
  Bottom Layer w0.2: v1(146.917,47.057) 146.919,47.059 150.436,47.059 X5.R_12
R_23: UR.23 X5.R_6 | length 68.2
  Top Layer w0.2: UR.23 105.025,40.43 ccw(c107.565,40.43) 105.769,38.634 109.384,35.019 ccw(c111.18,36.815) 111.18,34.275 135.957,34.275 ccw(c135.957,36.815) 137.753,35.019 146.24,43.505 cw(c147.494,42.251) 147.494,44.025 v1(148.025,44.025)
  Bottom Layer w0.2: v1(148.025,44.025) 150.35,44.025 ccw(c150.35,44.149) X5.R_6
R_24: UR.24 X5.R_8 | length 67
  Top Layer w0.2: UR.24@105.6,56.4 UR.24 105.825,41.127 ccw(c108.365,41.127) 106.569,39.331 110.093,35.807 ccw(c111.889,37.603) 111.889,35.063 135.308,35.063 ccw(c135.308,37.603) 137.104,35.807 145.691,44.393 cw(c146.917,43.167) v1(146.917,44.901)
  Bottom Layer w0.2: v1(146.917,44.901) cw(c147.304,44.515) 147.304,45.061 X5.R_8
R_25: UR.25 X5.R_10 | length 65.3
  Top Layer w0.2: UR.25 cw(c106.444,56.4) 106.572,56.272 106.525,56.225 106.525,41.702 ccw(c109.065,41.702) 107.269,39.906 110.431,36.744 ccw(c112.227,38.54) 112.227,36 134.55,36 ccw(c134.55,38.475) 136.3,36.725 144.81,45.235 cw(c146.606,43.439) 146.606,45.979 v1(147.995,45.979)
  Bottom Layer w0.2: v1(147.995,45.979) 150.239,45.979 ccw(c150.239,46.261) X5.R_10
R_42: UR.42 X5.R_33 | length 28.4
  Top Layer w0.2: UR.42 120.225,59.721 cw(c120.602,59.721) v1(120.335,59.988)
  Bottom Layer w0.2: v1(120.335,59.988) 121.355,58.969 ccw(c123.151,60.765) 123.151,58.225 144.075,58.225 144.098,58.202 ccw(c144.438,58.543) X5.R_33
R_43: UR.43 X5.R_31 | length 25.5
  Top Layer w0.2: UR.43 121.025,57.045 cw(c121.124,57.045) 121.054,57.114 121.025,57.143 v1(121.025,58.1)
  Bottom Layer w0.2: v1(121.025,58.1) 121.32,57.805 ccw(c123.116,59.601) 123.116,57.061 X5.R_31
R_44: UR.44 X5.R_29 | length 23.2
  Top Layer w0.2: UR.44@121.87,56.298 121.865,56.303 cw(c121.962,56.4) UR.44 v2(121.957,56.268)
  Bottom Layer w0.2: v2(121.957,56.268) 121.825,56.4 ccw(c122.643,57.218) 122.643,56.061 X5.R_29
RA0: UR.3 X5.R_20 | length 38.7
  Top Layer w0.2: UR.3 120.225,68.675 cw(c120.809,68.675) 120.397,69.089 cw(c120.71,68.774) 120.71,69.218 124.294,69.218 cw(c124.294,66.678) 126.09,68.474 134.62,59.944 142.795,51.769 ccw(c144.591,53.565) 144.591,51.025 144.616,51 v1@146.825,51
  Bottom Layer w0.2: v1@146.825,51 147.2,51 147.225,51.025 cw(c147.313,50.937) 147.313,51.061 X5.R_20
  other v1: 146.675,51
RA1: UR.4 X5.R_22 | length 39.6
  Top Layer w0.2: UR.4 119.425,67.963 ccw(c119.271,67.963) 119.38,68.072 119.38,68.37 cw(c121.114,68.37) 119.888,69.596 cw(c120.501,68.983) 120.501,69.85 124.625,69.85 cw(c124.625,67.375) 126.375,69.125 127.25,68.25 142.681,52.819 ccw(c144.477,54.615) 144.477,52.075 147.865,52.075 cw(c147.865,51.99) v1@147.925,52.05
  Bottom Layer w0.2: v1@147.925,52.05 150.411,52.05 ccw(c150.411,52.089) X5.R_22
  other v1: 148.075,52.05
RA2: UR.5 X5.R_24 | length 40.6
  Top Layer w0.2: UR.5 118.625,67.913 cw(c118.849,67.913) 118.691,68.072 118.691,68.44 cw(c121.044,68.44) 119.38,70.104 cw(c120.215,69.269) 120.215,70.45 124.973,70.45 cw(c124.973,67.91) 126.769,69.706 142.877,53.598 ccw(c144.14,54.862) 144.14,53.075 v1@146.825,53.075
  Bottom Layer w0.2: v1@146.825,53.075 150.246,53.075 cw(c150.246,53.028) 150.279,53.061 X5.R_24
  other v1: 146.675,53.075
RA3: UR.6 X5.R_26 | length 41.5
  Top Layer w0.2: UR.6 117.825,67.997 cw(c117.931,67.997) 117.856,68.072 117.856,68.529 cw(c120.396,68.529) 118.6,70.325 118.651,70.376 cw(c120.447,68.58) 120.447,71.12 125.44,71.12 cw(c125.44,68.58) 127.236,70.376 137.668,59.944 142.818,54.794 ccw(c144.614,56.59) 144.614,54.05 v1@147.85,54.05
  Bottom Layer w0.2: v1@147.85,54.05 cw(c147.877,54.023) 147.877,54.061 X5.R_26
  other v1: 148.075,54.05
RA4: UR.7 X5.R_28 | length 43.1
  Top Layer w0.2: UR.7 117.025,69.023 cw(c119.565,69.023) 117.769,70.819 118.156,71.206 cw(c119.952,69.41) 119.952,71.95 125.626,71.95 cw(c125.626,69.41) 127.422,71.206 142.748,55.88 143.034,55.594 ccw(c144.83,57.39) 144.83,54.85 v1(146.675,54.85)
  Bottom Layer w0.2: v1(146.675,54.85) 149.928,54.85 ccw(c149.928,55.572) X5.R_28
RA5: UR.16 X5.R_42 | length 52.2
  Top Layer w0.2: UR.16 109.825,70.598 cw(c112.365,70.598) 110.569,72.394 114.25,76.075 cw(c115.819,74.506) 115.819,76.725 128.348,76.725 cw(c128.348,74.185) 130.144,75.981 143.25,62.875 ccw(c145,64.625) 143.753,62.487 ccw(c144.99,63.724) 144.99,61.975 v1@147.925,61.975
  Bottom Layer w0.2: v1@147.925,61.975 cw(c148.133,61.767) 148.133,62.061 X5.R_42
  other v1: 148.075,61.975
RA6: UR.17 X5.R_44 | length 53.2
  Top Layer w0.2: UR.17 109.025,70.837 cw(c111.565,70.837) 109.769,72.633 113.717,76.581 cw(c115.513,74.785) 115.513,77.325 128.887,77.325 cw(c128.887,74.785) 130.683,76.581 132.08,75.184 143.676,63.588 ccw(c145.115,65.027) 145.115,62.992 v1@146.957,62.992
  Bottom Layer w0.2: v1@146.957,62.992 cw(c147.125,62.825) 147.125,63.061 X5.R_44
  other v1: 146.675,62.992
RA7: UR.18 X5.R_46 | length 54.2
  Top Layer w0.2: UR.18 108.225,71.023 cw(c110.765,71.023) 108.969,72.819 113.406,77.256 cw(c115.202,75.46) 115.202,78 129.173,78 cw(c129.173,75.46) 130.969,77.256 143.65,64.575 ccw(c144.978,65.903) 144.517,64.082 ccw(c144.978,65.903) 144.978,64.025 v1(148.075,64.025)
  Bottom Layer w0.2: v1(148.075,64.025) ccw(c148.116,64.066) 148.116,64.008 150.368,64.008 150.41,64.05 cw(c150.438,64.021) X5.R_46
RA8: UR.19 X5.R_48 | length 55.1
  Top Layer w0.2: UR.19 107.425,70.948 cw(c109.965,70.948) 108.169,72.745 113.282,77.857 cw(c115.075,76.064) 115.075,78.6 129.348,78.6 cw(c129.348,76.06) 131.144,77.856 135.025,73.975 143.377,65.623 ccw(c144.823,67.069) 144.823,65.024 v1@146.812,65.024
  Bottom Layer w0.2: v1@146.812,65.024 cw(c146.902,64.934) 146.902,65.061 X5.R_48
  other v1: 146.675,65.024
RA9: UR.20 X5.R_50 | length 56
  Top Layer w0.2: UR.20 106.625,71.039 cw(c109.165,71.039) 107.369,72.835 112.94,78.406 cw(c114.736,76.61) 114.736,79.15 129.747,79.15 cw(c129.747,76.61) 131.543,78.406 143.653,66.296 ccw(c144.489,67.133) 144.489,65.95 v1(148.075,65.95)
  Bottom Layer w0.2: v1(148.075,65.95) 150.151,65.95 ccw(c150.151,66.257) 150.368,66.04 cw(c150.42,65.988) 150.42,66.061 X5.R_50
RA10: UR.26 X5.R_1 | length 55.6
  Top Layer w0.2: v1(107.4,55.225) 107.4,56.34 cw(c107.485,56.34) UR.26
  Bottom Layer w0.2: v1(107.4,55.225) cw(c107.098,54.923) 107.525,54.923 107.525,42.352 ccw(c110.065,42.352) 108.269,40.556 111.256,37.569 ccw(c113.052,39.365) 113.052,36.825 134.473,36.825 ccw(c134.473,39.365) 136.269,37.569 140.017,41.317 cw(c141.813,39.521) 141.813,42.061 X5.R_1
RA11: UR.27 X5.R_3 | length 57.1
  Top Layer w0.2: UR.27 108.225,57.665 cw(c108.31,57.665) v1@108.25,57.725
  Bottom Layer w0.2: v1@108.25,57.725 108.25,42.662 ccw(c110.79,42.662) 108.994,40.866 111.524,38.336 ccw(c113.32,40.132) 113.32,37.592 134.14,37.592 ccw(c134.14,40.132) 135.936,38.336 139.917,42.317 cw(c141.713,40.521) 141.713,43.061 X5.R_3
  other v1: 108.25,57.65
RA12: R2.2 UR.28 X5.R_5 | length 58.2
  Top Layer w0.2: v1@108.975,55.2 ccw(c108.854,55.321) 109.025,55.321 UR.28
  Bottom Layer w0.2: v1@108.975,55.2 108.975,43.152 ccw(c111.515,43.152) 109.719,41.356 112.031,39.044 ccw(c113.827,40.84) 113.827,38.3 133.848,38.3 ccw(c133.848,40.84) 135.644,39.044 139.917,43.317 cw(c141.713,41.521) 141.713,44.061 X5.R_5 ; v1(108.975,55.225) 108.975,59.077 cw(c110.264,59.077) R2.2
RA13: UR.29 X5.R_7 | length 54.6
  Top Layer w0.2: UR.29 v1(109.825,57.65)
  Bottom Layer w0.2: v1(109.825,57.65) 109.825,43.352 ccw(c112.365,43.352) 110.569,41.556 112.265,39.86 ccw(c114.061,41.656) 114.061,39.116 133.539,39.116 ccw(c133.539,41.656) 135.335,39.86 139.792,44.317 cw(c141.588,42.521) 141.588,45.061 X5.R_7
RA14: UR.30 X5.R_9 | length 50.6
  Top Layer w0.2: v1@110.6,55.125 110.6,56.34 cw(c110.685,56.34) UR.30
  Bottom Layer w0.2: v1@110.6,55.125 110.6,44.152 ccw(c113.14,44.152) 111.344,42.356 113.031,40.669 ccw(c114.827,42.465) 114.827,39.925 133.248,39.925 ccw(c133.248,42.465) 135.044,40.669 139.692,45.317 cw(c141.488,43.521) 141.488,46.061 X5.R_9
  other v1: 110.6,55.225
RA15: UR.38 X5.R_21 | length 30.5
  Top Layer w0.2: UR.38 117.025,55.235 ccw(c117.11,55.235) v1@117.05,55.175
  Bottom Layer w0.2: v1@117.05,55.175 117.05,54.561 ccw(c118.586,54.561) 117.5,53.475 118.17,52.805 ccw(c119.966,54.601) 119.966,52.061 X5.R_21
  other v1: 117.05,55.225
RA16: UR.39 X5.R_23 | length 31.9
  Top Layer w0.2: UR.39 117.827,56.4 cw(c117.827,56.359) 117.856,56.388 v1@117.856,57.912
  Bottom Layer w0.2: v1@117.856,57.912 117.856,55.207 ccw(c119.457,55.207) 118.325,54.075 118.595,53.805 ccw(c120.391,55.601) 120.391,53.061 X5.R_23
  other v1: 117.856,57.65
RA17: UR.40 X5.R_25 | length 27.2
  Top Layer w0.2: UR.40 118.625,56.352 cw(c118.198,56.352) 118.5,56.05 ccw(c119.239,56.05) 118.716,55.528 v1(118.872,55.372)
  Bottom Layer w0.2: v1(118.872,55.372) 119.439,54.805 ccw(c121.235,56.601) 121.235,54.061 X5.R_25
RA18: UR.41 X5.R_27 | length 28.8
  Top Layer w0.2: v1@119.38,57.912 119.38,56.509 ccw(c119.534,56.509) UR.41
  Bottom Layer w0.2: v1@119.38,57.912 119.38,56.598 ccw(c121.114,56.598) 119.888,55.372 ccw(c120.638,56.122) 120.638,55.061 X5.R_27
  other v1: 119.38,57.65
RCS: UR.8 X5.R_30 | length 44
  Top Layer w0.2: UR.8 116.225,69.223 cw(c118.765,69.223) 116.969,71.019 117.85,71.9 cw(c119.646,70.104) 119.646,72.644 126.172,72.644 cw(c126.172,70.104) 127.968,71.9 129.54,70.328 142.974,56.894 ccw(c144.77,58.69) 144.77,56.15 v1@147.9,56.15
  Bottom Layer w0.2: v1@147.9,56.15 150.224,56.15 cw(c150.224,55.847) X5.R_30
  other v1: 148.075,56.15
RD0: R4.1 UR.9 X1.7 X5.R_32 | length 90.8
  Top Layer w0.2: UR.9 115.425,69.423 ; v1(116.55,71.6) 116.169,71.219 ccw(c117.965,69.423) 115.425,69.423 ; v1@146.8,56.925 145.091,56.925 cw(c145.091,58.802) 143.764,57.475 cw(c145.17,59.59) 143.374,57.794 131.064,70.104 128.252,72.916 ccw(c126.456,71.12) 126.456,73.66 117.848,73.66 ccw(c117.848,72.602) 117.1,73.35 116.086,72.336 ccw(c117.623,70.8) 115.45,70.8 ccw(c115.51,70.74) 115.425,70.74 115.425,69.423
  Bottom Layer w0.2: X1.7 cw(c102.653,107.601) 102.95,107.601 102.95,103.95 ccw(c104.672,103.95) 103.454,102.732 104.369,101.818 cw(c104.447,101.74) 104.447,101.85 R4.1 ccw(c105.82,101.85) 105.222,101.253 115.806,90.669 cw(c114.01,88.873) 116.55,88.873 v1(116.55,71.6) ; v1@146.8,56.925 150.109,56.925 ccw(c150.109,57.391) X5.R_32
  other v1: 146.675,56.925
RD1: R7.1 UR.10 X1.9 X5.R_34 | length 93.7
  Top Layer w0.2: v1(113.875,69.9) cw(c113.875,69.608) 114.082,69.814 114.3,69.596 cw(c113.515,68.811) 114.625,68.811 ; UR.10 114.625,68.811 ; v1@147.9,58.075 144.89,58.075 cw(c144.89,59.668) 143.764,58.542 cw(c145.036,60.74) 143.24,58.944 128.628,73.556 ccw(c126.832,71.76) 126.832,74.3 117.369,74.3 ccw(c117.369,72.115) 115.824,73.66 115.369,73.205 ccw(c117.165,71.409) 114.625,71.409 114.625,68.811
  Bottom Layer w0.2: X1.9 100.863,98.284 ccw(c102.184,98.284) 101.25,97.35 ccw(c102.397,98.497) 102.397,96.875 R7.1 104.975,95.56 ccw(c106.085,95.56) 105.3,94.775 113.131,86.944 cw(c111.335,85.148) 113.875,85.148 v1(113.875,69.9) ; v1@147.933,58.061 X5.R_34
  other v1: 148.075,58.075
RD2: UR.13 X5.R_36 | length 49.1
  Top Layer w0.2: UR.13 112.225,70.025 cw(c114.765,70.025) 112.969,71.821 115.279,74.131 cw(c117.075,72.335) 117.075,74.875 127.273,74.875 cw(c127.273,72.335) 129.069,74.131 130.8,72.4 143.331,59.869 ccw(c145.127,61.665) 143.73,59.544 ccw(c144.802,60.616) 144.802,59.1 v1@146.825,59.1
  Bottom Layer w0.2: v1@146.825,59.1 ccw(c146.918,59.193) 146.918,59.061 X5.R_36
  other v1: 146.675,59.1
RD3: UR.14 X5.R_38 | length 50.3
  Top Layer w0.2: UR.14 111.425,70.373 cw(c113.965,70.373) 112.169,72.169 114.706,74.706 cw(c116.502,72.91) 116.502,75.45 127.823,75.45 cw(c127.823,72.91) 129.619,74.706 143.506,60.819 ccw(c145.302,62.615) 143.752,60.603 ccw(c145.147,61.998) 145.147,60.025 v1@147.95,60.025
  Bottom Layer w0.2: v1@147.95,60.025 ccw(c148.146,60.221) 148.146,59.944 150.368,59.944 150.405,59.981 ccw(c150.324,60.061) X5.R_38
  other v1: 148.075,60.025
RD4: UR.31 X5.R_11 | length 52.2
  Top Layer w0.2: UR.31 v1@111.425,57.775
  Bottom Layer w0.2: v1@111.425,57.775 111.425,44.577 ccw(c113.965,44.577) 112.169,42.781 114.175,40.775 ccw(c114.501,41.101) 114.501,40.64 132.913,40.64 ccw(c132.913,43.18) 134.709,41.384 139.9,46.575 cw(c141.074,45.401) 141.074,47.061 X5.R_11
  other v1: 111.425,57.65
RD5: UR.32 X5.R_13 | length 48
  Top Layer w0.2: v1@112.225,55.125 UR.32
  Bottom Layer w0.2: v1@112.225,55.125 112.175,55.075 112.175,45.127 ccw(c114.715,45.127) 112.919,43.331 114.099,42.151 ccw(c115.895,43.947) 115.895,41.407 132.505,41.407 ccw(c132.505,43.947) 134.301,42.151 139.467,47.317 cw(c141.263,45.521) 141.263,48.061 X5.R_13
  other v1: 112.225,55.225
RD6: UR.35 X5.R_15 | length 47.9
  Top Layer w0.2: v1@114.6,57.85 ccw(c114.66,57.79) 114.575,57.79 114.575,56.375 114.582,56.382 cw(c114.625,56.34) UR.35
  Bottom Layer w0.2: v1@114.6,57.85 114.6,45.964 ccw(c117.14,45.964) 115.344,44.168 116.604,42.908 ccw(c118.4,44.704) 118.4,42.164 132.044,42.164 ccw(c132.044,44.704) 133.84,42.908 139.249,48.317 cw(c141.045,46.521) 141.045,49.061 X5.R_15
  other v1: 114.6,57.65
RD7: UR.36 X5.R_17 | length 33.2
  Top Layer w0.2: UR.36 115.425,55.271 ccw(c115.596,55.271) v1@115.475,55.15
  Bottom Layer w0.2: v1@115.475,55.15 115.475,54.233 ccw(c118.015,54.233) 116.219,52.437 117.62,51.036 ccw(c119.416,52.832) 119.416,50.292 143.881,50.292 cw(c143.881,49.505) X5.R_17
  other v1: 115.475,55.225
RGND: C1.2 R2.1 UR.12 UR.34 X1.1 X1.8 X1.10 X1.40 | length 3.2
  Top Layer w0.2: v1(113.025,66.3) UR.12 ; UR.34 113.825,55.271 ccw(c113.996,55.271) v1(113.875,55.15) ; v2(129.032,98.552) 129.067,98.517 ccw(c129.35,98.801) C1.2
ROE: UR.37 X5.R_19 | length 35.3
  Top Layer w0.2: UR.37 ccw(c115.967,56.658) 116.332,56.658 v1@116.332,57.912
  Bottom Layer w0.2: v1@116.332,57.912 116.332,54.058 ccw(c118.066,54.058) 116.84,52.832 117.903,51.769 ccw(c119.699,53.565) 119.699,51.025 144.591,51.025 ccw(c144.503,50.937) 144.503,51.061 X5.R_19
  other v1: 116.332,57.65
RWE: UR.15 X5.R_40 | length 51.2
  Top Layer w0.2: UR.15 110.625,70.473 cw(c113.165,70.473) 111.369,72.269 114.5,75.4 cw(c116.19,73.71) 116.19,76.1 128.08,76.1 cw(c128.08,73.56) 129.876,75.356 143.413,61.819 ccw(c145.209,63.615) 143.932,61.419 ccw(c144.884,62.371) 144.884,61.025 v1@146.975,61.025
  Bottom Layer w0.2: v1@146.975,61.025 cw(c147.063,60.937) 147.063,61.061 X5.R_40
  other v1: 146.675,61.025
pads on no net: X1.5 X1.6 X1.15 X1.16 X1.22 X1.23 X1.24 X1.25 X1.26 X1.27 X1.28 X1.29 X1.30 X1.31 X1.32 X1.33 X1.34 X1.35 X1.36 X1.37 X1.38 X1.39 X1.H1 X1.H2 X1.UL_HOLE X1.UR_HOLE X4.1 X4.R_32 X4.R_34 X4.R_36 X4.R_38 X4.R_40 X4.R_42 X4.R_44 X4.R_46 X4.R_48 X4.R_50 X4.R_51 X4.R_52 X4.R_53 X4.R_54 X4.R_55 X4.R_56 X4.R_57 X4.R_58 X4.R_59 X4.R_60 X4.R_61 X4.R_62 X4.R_63 X4.R_64 X4.R_65 X4.R_66 X4.R_67 X4.R_68 X4.R_69 X4.R_70 X4.R_71 X4.R_72 X4.R_73 X4.R_74 X4.R_75 X4.R_76 X4.R_77 X4.R_78 X4.R_79 X4.R_80 X4.R_81 X4.R_82 X4.R_83 X4.R_84 X4.R_85 X4.R_86 X4.R_87 X4.R_88 X4.R_89 X4.R_90 X4.R_91 X4.R_92 X4.R_93 X4.R_94 X4.R_95 X4.R_96 X4.R_97 X4.R_98 X4.R_99 X4.R_100 X4.RB_HOLE X4.RM_HOLE X4.RU_HOLE X5.1 X5.R_2 X5.R_4 X5.R_35 X5.R_37 X5.R_39 X5.R_41 X5.R_43 X5.R_45 X5.R_47 X5.R_49 X5.R_51 X5.R_52 X5.R_53 X5.R_54 X5.R_55 X5.R_56 X5.R_57 X5.R_58 X5.R_59 X5.R_60 X5.R_61 X5.R_62 X5.R_63 X5.R_64 X5.R_65 X5.R_66 X5.R_67 X5.R_68 X5.R_69 X5.R_70 X5.R_71 X5.R_72 X5.R_73 X5.R_74 X5.R_75 X5.R_76 X5.R_77 X5.R_78 X5.R_79 X5.R_80 X5.R_81 X5.R_82 X5.R_83 X5.R_84 X5.R_85 X5.R_86 X5.R_87 X5.R_88 X5.R_89 X5.R_90 X5.R_91 X5.R_92 X5.R_93 X5.R_94 X5.R_95 X5.R_96 X5.R_97 X5.R_98 X5.R_99 X5.R_100 X5.RB_HOLE X5.RM_HOLE X5.RU_HOLE

## Polygon pours and split planes (outlines as drawn)
NetC2_1 on Top Layer "Top Layer-No Net 1" (hatched 45Degree grid 0.508 track 0.203, remove dead copper, pour order 18): 46.175,100.025 79.2,100.025 82.6,103.425 82.529,103.496 82.529,113.855 84.449,115.775 98.375,115.775 98.9,115.25 98.9,115.175 98.75,115.025 98.75,33.3 98.3,33.3 46.875,33.5
NetC1_1 on Top Layer "Top Layer-NetC1_1" (hatched 45Degree grid 0.508 track 0.203, remove dead copper, pour order 24): 99.9,115.075 99.9,115.325 100.35,115.775 114.8,115.775 116.275,114.3 116.275,103.025 116.325,103.025 119,100.35 152.875,100.35 153.2,100.025 153.2,33.7 153.175,33.675 100.15,33.675
no net on Top Layer "Top Layer-No Net" (hatched 45Degree grid 0.508 track 0.203, pour order 20): 98.375,33.125
LGND on Bottom Layer "Bottom Layer-LGND" (hatched 45Degree grid 0.508 track 0.203, remove dead copper, pour order 22): 98.375,115.775 84.449,115.775 82.529,113.855 82.529,103.496 82.6,103.425 79.2,100.025 46.175,100.025 46.175,33.95 46.375,33.75 98.55,33.75 98.725,33.575
RGND on Bottom Layer "Bottom Layer-RGND" (hatched 45Degree grid 0.508 track 0.203, remove dead copper, pour order 26): 99.675,115.075 100.35,115.75 100.35,115.775 114.8,115.775 116.325,114.25 116.325,103.025 119.325,100.025 153.2,100.025 153.2,33.7 153.175,33.675 100.15,33.675

## Other copper
Top Layer:
  text "IS61WV5128FBLL-10TLI" at 155.9,67.575 h2 r90

## Silkscreen, mask and mechanical layers (free items; w line width, h text height)
Top Overlay:
  lines w0.2: 89.029,107.855 82.529,107.855 82.529,113.855 89.029,113.855 ; 74.4,41.407 74.4,99.06 124.4,99.06 124.4,41.407 74.4,41.407
Mechanical 1:
  lines w0.2: 53.899,123.718 41.4,123.718 41.4,29.718 157.402,29.718 157.402,123.718 144.905,123.718 ; 53.902,123.721 53.902,118.571 ccw(c69.927,118.908) 81.402,107.718 81.402,123.718 117.402,123.718 117.402,107.718 ccw(c128.877,118.908) 144.902,118.571 144.902,123.721
Mechanical 8:
  lines w0.2: 41.402,29.718 157.402,123.718 ; 41.402,123.718 157.402,29.718 ; 41.684,76.718 99.402,76.718 ; 50.561,41.986 52.563,41.986 ; 50.561,98.986 52.563,98.986 ; 52.563,40.038 52.563,41.986 ; 52.563,44.038 52.563,41.986 ; 52.563,97.038 52.563,98.986 ; 52.563,101.038 52.563,98.986 ; 54.561,41.986 52.563,41.986 ; 54.561,98.986 52.563,98.986 ; 83.761,110.811 85.763,110.811 ; 85.763,108.863 85.763,110.811 ; 85.763,112.863 85.763,110.811 ; 87.761,110.811 85.763,110.811 ; 87.861,110.811 89.863,110.811 ; 89.863,108.863 89.863,110.811 ; 89.863,112.863 89.863,110.811 ; 91.861,110.811 89.863,110.811 ; 99.402,29.718 99.402,76.718 ; 99.402,123.718 99.402,76.718 ; 106.861,110.811 108.863,110.811 ; 108.863,108.863 108.863,110.811 ; 108.863,112.863 108.863,110.811 ; 110.861,110.811 108.863,110.811 ; 110.961,110.811 112.963,110.811 ; 112.963,108.863 112.963,110.811 ; 112.963,112.863 112.963,110.811 ; 114.961,110.811 112.963,110.811 ; 145.436,42.061 147.438,42.061 ; 145.436,99.061 147.438,99.061 ; 147.438,40.113 147.438,42.061 ; 147.438,44.113 147.438,42.061 ; 147.438,97.113 147.438,99.061 ; 147.438,101.113 147.438,99.061 ; 149.436,42.061 147.438,42.061 ; 149.436,99.061 147.438,99.061 ; 157.402,76.718 99.402,76.718

## Text inside footprints (layer, text, board x,y; h text height)
C1: Top Overlay "+" at 129.725,90.066 h0.75 r90
C2: Top Overlay "+" at 69.971,89.662 h0.75 r90